# Altium PCB LED-18PCS.PcbDoc
Units mil, origin at the board's own origin, x right, y up, seen from the top; angles counter-clockwise.
Board outline 6000 x 4000 mil, 2 copper layers (Top Layer, Bottom Layer); 72 components, 5 nets, 198 pads, 18 vias.
Unrouted connection lines stored in the file: 85.
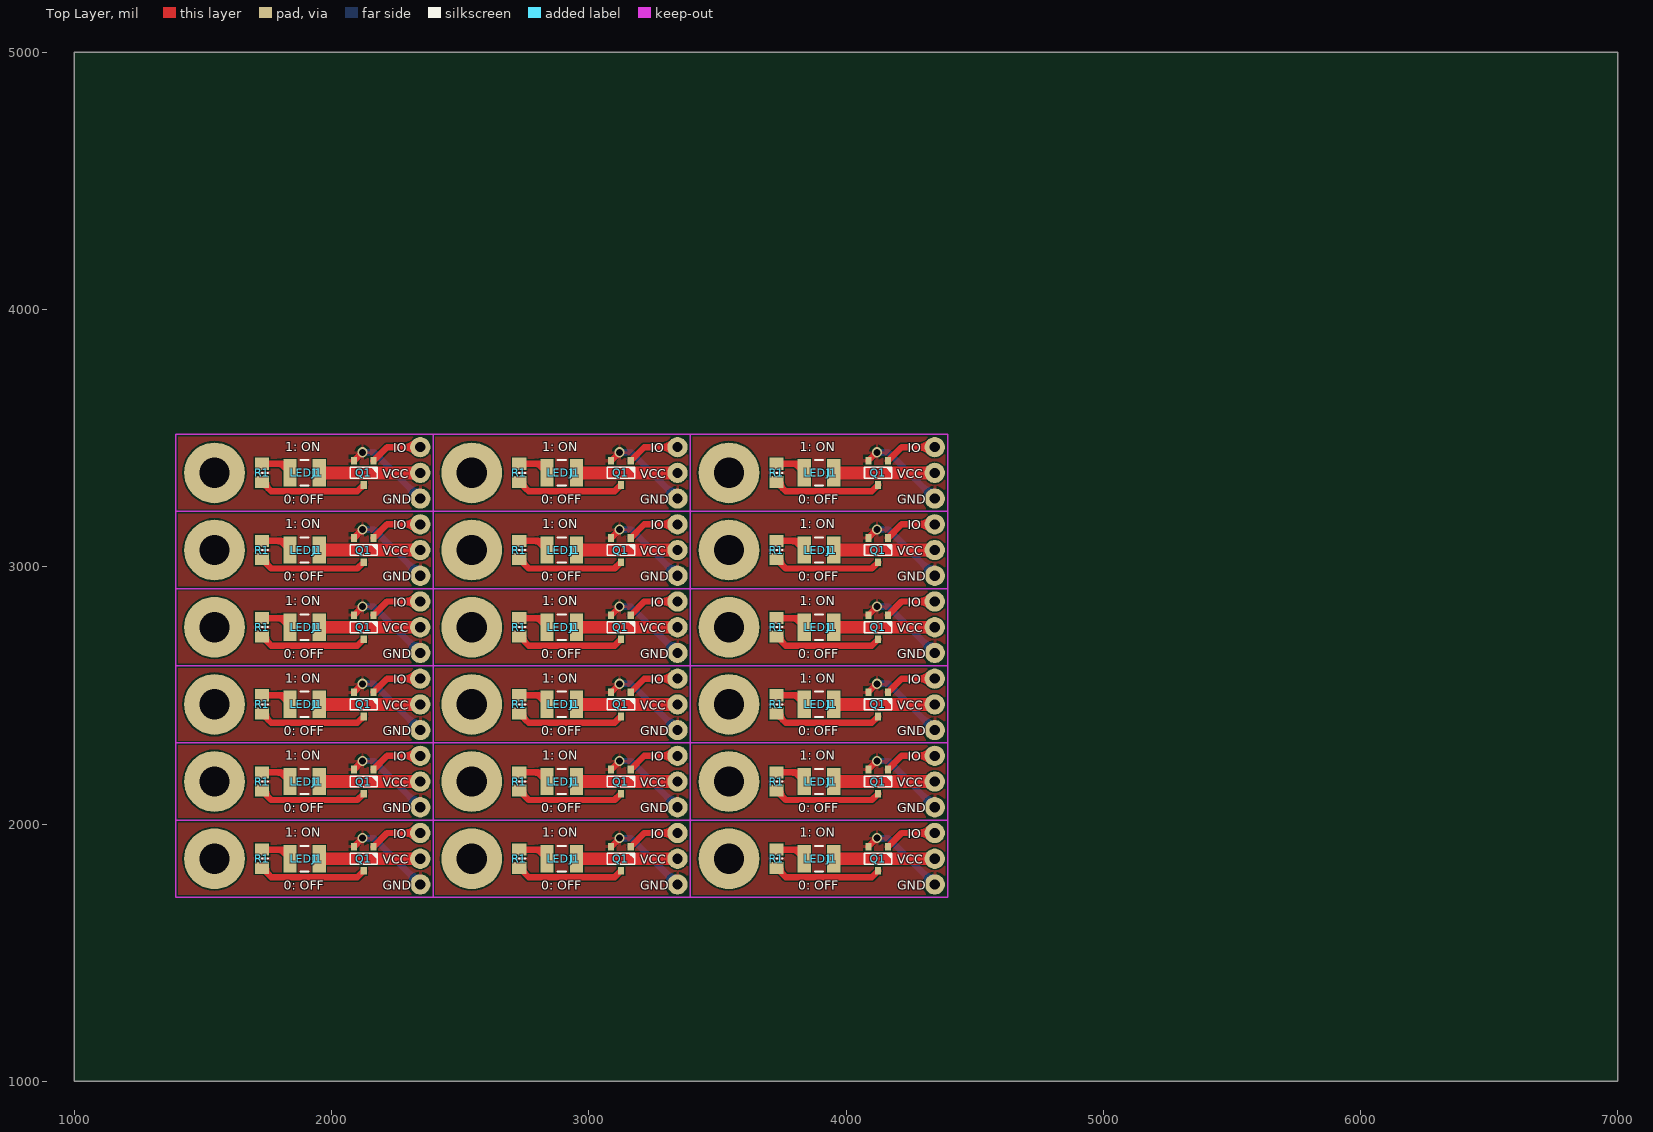
[diagram p0: Top Layer view]
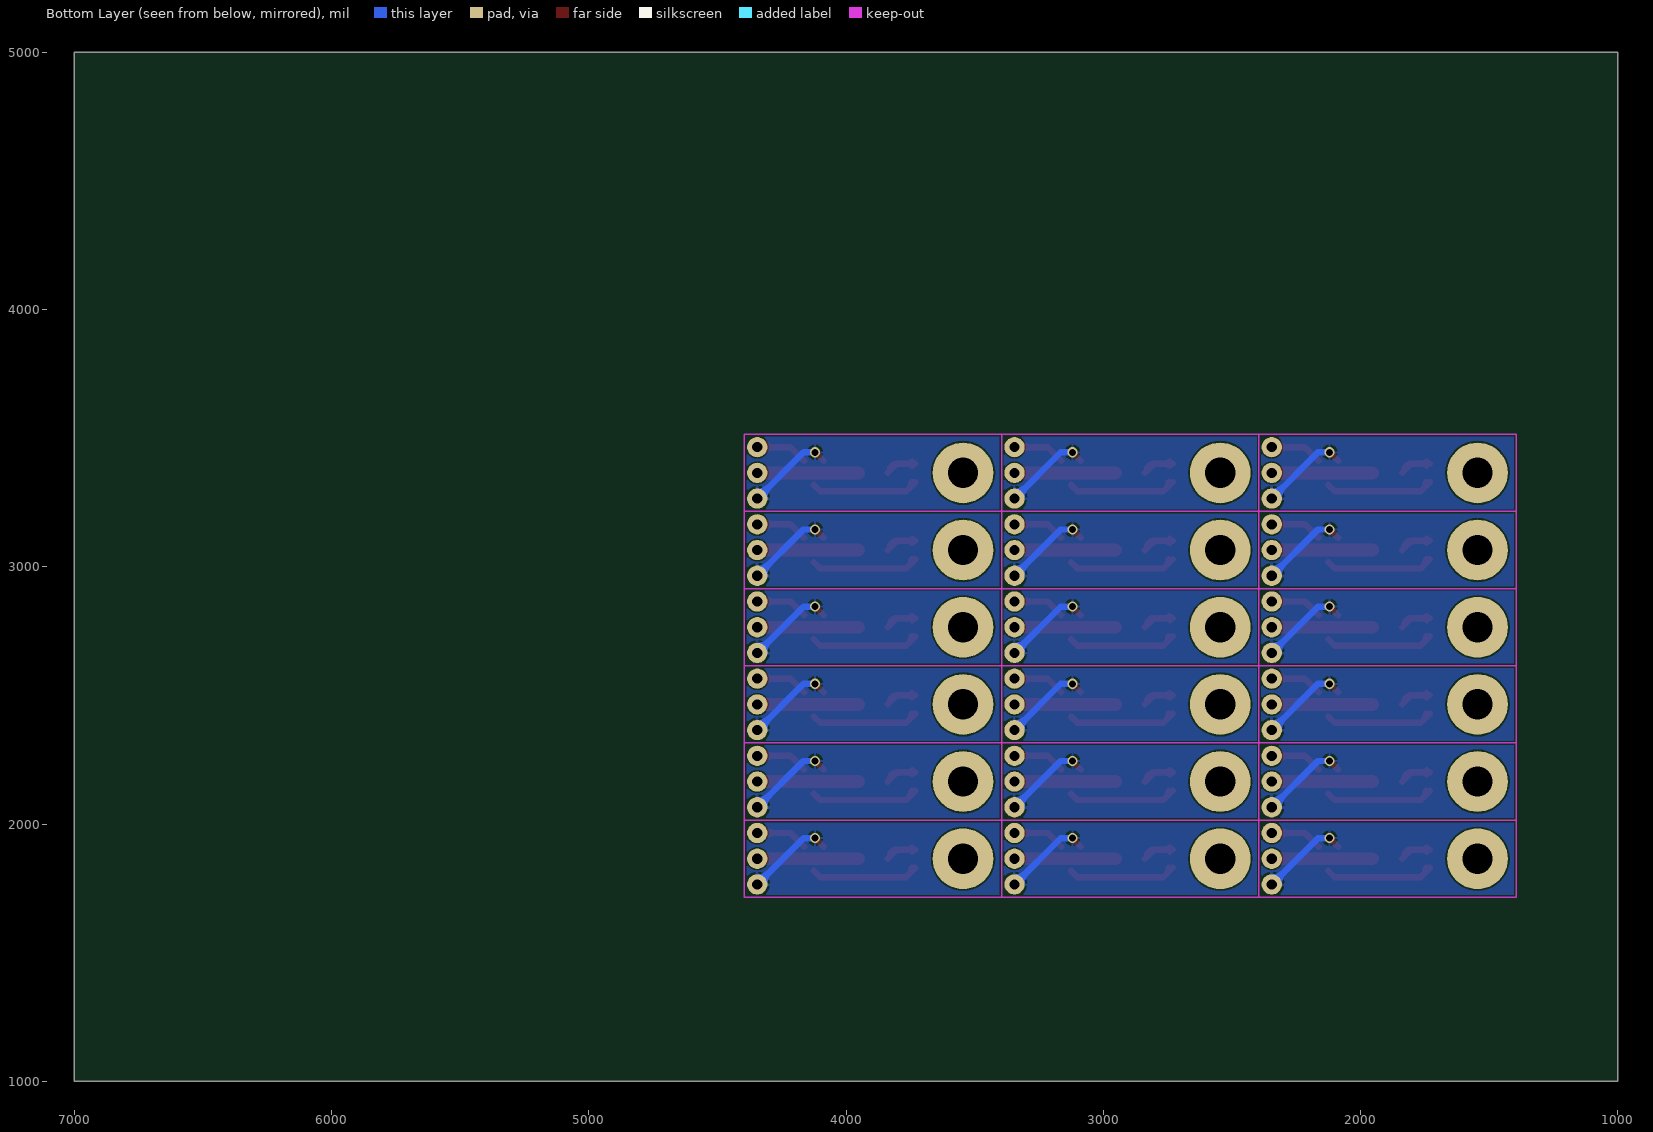
[diagram p1: Bottom Layer view, seen from below]

## Layer stack, top to bottom
Top Solder: solder mask 0.4, Solder Resist, Dk 3.5
Top Layer: signal copper 1.4
Dielectric 1: dielectric 12.6, FR-4, Dk 4.8
Bottom Layer: signal copper 1.4
Bottom Solder: solder mask 0.4, Solder Resist, Dk 3.5

## Board outline
1000,1000 7000,1000 7000,5000 1000,5000

## Design rules (kind name [scope] priority, off if disabled: settings)
Clearance [All] p1: gap=6
ComponentClearance [All] p1: gap=0 collisioncheckmode=3 verticalgap=0 showdistances=FALSE
PolygonConnect [All] p1: connectstyle=Relief reliefconductorwidth=10 reliefentries=4 polygonreliefangle="90 Angle" airgapwidth=10
RoutingVias [All] p1: holewidth=28 width=50 viastyle="Through Hole" minholewidth=28 minwidth=50 maxholewidth=28 maxwidth=50
SolderMaskExpansion [All] p1: expansion=4
Width [All] p1: maxlimit=100 minlimit=6 preferedwidth=10
28 further rules are at their usual default settings.

## Components (designator, comment, footprint, x,y, rotation, side; value= is the part's Value field where it differs from the comment)
J1 "CON3" DevModule 2895,3065 r0 top
J1 "CON3" DevModule 2895,3365 r0 top
J1 "CON3" DevModule 2895,2465 r0 top
J1 "CON3" DevModule 2895,2765 r0 top
J1 "CON3" DevModule 2895,1865 r0 top
J1 "CON3" DevModule 2895,2165 r0 top
J1 "CON3" DevModule 3895,2165 r0 top
J1 "CON3" DevModule 3895,1865 r0 top
J1 "CON3" DevModule 3895,2765 r0 top
J1 "CON3" DevModule 3895,2465 r0 top
J1 "CON3" DevModule 3895,3365 r0 top
J1 "CON3" DevModule 3895,3065 r0 top
J1 "CON3" DevModule 1895,2165 r0 top
J1 "CON3" DevModule 1895,1865 r0 top
J1 "CON3" DevModule 1895,2765 r0 top
J1 "CON3" DevModule 1895,2465 r0 top
J1 "CON3" DevModule 1895,3365 r0 top
J1 "CON3" DevModule 1895,3065 r0 top
LED1 "1210" C1210_N 2895,3065 r180 top
LED1 "1210" C1210_N 2895,3365 r180 top
LED1 "1210" C1210_N 2895,2465 r180 top
LED1 "1210" C1210_N 2895,2765 r180 top
LED1 "1210" C1210_N 2895,1865 r180 top
LED1 "1210" C1210_N 2895,2165 r180 top
LED1 "1210" C1210_N 3895,2165 r180 top
LED1 "1210" C1210_N 3895,1865 r180 top
LED1 "1210" C1210_N 3895,2765 r180 top
LED1 "1210" C1210_N 3895,2465 r180 top
LED1 "1210" C1210_N 3895,3365 r180 top
LED1 "1210" C1210_N 3895,3065 r180 top
LED1 "1210" C1210_N 1895,2165 r180 top
LED1 "1210" C1210_N 1895,1865 r180 top
LED1 "1210" C1210_N 1895,2765 r180 top
LED1 "1210" C1210_N 1895,2465 r180 top
LED1 "1210" C1210_N 1895,3365 r180 top
LED1 "1210" C1210_N 1895,3065 r180 top
Q1 "BJT_NPN" SOT23-3 3125,3065 r270 top
Q1 "BJT_NPN" SOT23-3 3125,3365 r270 top
Q1 "BJT_NPN" SOT23-3 3125,2465 r270 top
Q1 "BJT_NPN" SOT23-3 3125,2765 r270 top
Q1 "BJT_NPN" SOT23-3 3125,1865 r270 top
Q1 "BJT_NPN" SOT23-3 3125,2165 r270 top
Q1 "BJT_NPN" SOT23-3 4125,2165 r270 top
Q1 "BJT_NPN" SOT23-3 4125,1865 r270 top
Q1 "BJT_NPN" SOT23-3 4125,2765 r270 top
Q1 "BJT_NPN" SOT23-3 4125,2465 r270 top
Q1 "BJT_NPN" SOT23-3 4125,3365 r270 top
Q1 "BJT_NPN" SOT23-3 4125,3065 r270 top
Q1 "BJT_NPN" SOT23-3 2125,2165 r270 top
Q1 "BJT_NPN" SOT23-3 2125,1865 r270 top
Q1 "BJT_NPN" SOT23-3 2125,2765 r270 top
Q1 "BJT_NPN" SOT23-3 2125,2465 r270 top
Q1 "BJT_NPN" SOT23-3 2125,3365 r270 top
Q1 "BJT_NPN" SOT23-3 2125,3065 r270 top
R1 "4.7K" 6-0805_N 2730,3065 r90 top
R1 "4.7K" 6-0805_N 2730,3365 r90 top
R1 "4.7K" 6-0805_N 2730,2465 r90 top
R1 "4.7K" 6-0805_N 2730,2765 r90 top
R1 "4.7K" 6-0805_N 2730,1865 r90 top
R1 "4.7K" 6-0805_N 2730,2165 r90 top
R1 "4.7K" 6-0805_N 3730,2165 r90 top
R1 "4.7K" 6-0805_N 3730,1865 r90 top
R1 "4.7K" 6-0805_N 3730,2765 r90 top
R1 "4.7K" 6-0805_N 3730,2465 r90 top
R1 "4.7K" 6-0805_N 3730,3365 r90 top
R1 "4.7K" 6-0805_N 3730,3065 r90 top
R1 "4.7K" 6-0805_N 1730,2165 r90 top
R1 "4.7K" 6-0805_N 1730,1865 r90 top
R1 "4.7K" 6-0805_N 1730,2765 r90 top
R1 "4.7K" 6-0805_N 1730,2465 r90 top
R1 "4.7K" 6-0805_N 1730,3365 r90 top
R1 "4.7K" 6-0805_N 1730,3065 r90 top

## Footprints (in the part's own frame and the unit in brackets; to place one, negate y for a bottom-side part, rotate by r counter-clockwise, add the part's x,y. Pads: shape width x height; smd on the part's side, far side on the other; paste and mask are expansions set on the pad)
6-0805_N [mm] "Chip Resistor, Body 2.0x1.2mm, IPC Medium Density"
  rect 1.2x1.4 smd: 1(-0.9,0) 2(0.9,0)
  silkscreen extent 0,-0.6 0,0.6, body extent -1.07,-0.7 1.07,0.7, height 0.7
C1210_N [mm] "Chip Capacitor, Body 3.2x2.5mm, IPC Medium Density"
  rect 1.3x2.7 smd: 1(-1.45,0) 2(1.45,0)
  silkscreen extent -0.4,-1.25 0.4,1.25, body extent -1.7,-1.35 1.7,1.35, height 1.5
DevModule [mm]
  round 6 hole 3: 0(-8.89,0)
  round 2 hole 1: 1(11.43,2.54) 2(11.43,0) 3(11.43,-2.54)
  Keep-Out Layer lines w0.152: -12.7,-3.81 12.7,-3.81 12.7,3.81 -12.7,3.81 -12.7,-3.81
SOT23-3 [mil]
  rect 30x24 smd: 1(-47,38) 2(-47,-38) 3(47,0)
  silkscreen extent -21,-53 21,53, body extent -55,-57 55,57, height 51

## Part data
J1 J1 J1 J1 J1 J1 J1 J1 J1 J1 J1 J1 J1 J1 J1 J1 J1 J1: "Connector"
LED1 LED1 LED1 LED1 LED1 LED1 LED1 LED1 LED1 LED1 LED1 LED1 LED1 LED1 LED1 LED1 LED1 LED1: library part LED_3
Q1 Q1 Q1 Q1 Q1 Q1 Q1 Q1 Q1 Q1 Q1 Q1 Q1 Q1 Q1 Q1 Q1 Q1: "Transistor"
R1 R1 R1 R1 R1 R1 R1 R1 R1 R1 R1 R1 R1 R1 R1 R1 R1 R1: library part RES1_1

## Via types
v1: diameter 39.37, hole 27.56, Top Layer to Bottom Layer, tented both sides, 18 vias

## Nets (pads, with @x,y where several pads share a name; then routed paths per layer and width w, separated by ;. In a path a pad name is that pad's centre, name@x,y a point inside that pad or via, vN(x,y) a via of type N, cw(c..) or ccw(c..) an arc to the next point about the centre after c; other vN are vias at no path point)
GND: J1.3 Q1.2 | length 8066.3
  Top Layer w25: Q1.2@2087,1912 v1(2120,1945) ; Q1.2@2087,2212 v1(2120,2245) ; Q1.2@2087,2512 v1(2120,2545) ; Q1.2@2087,2812 v1(2120,2845) ; Q1.2@2087,3112 v1(2120,3145) ; Q1.2@2087,3412 v1(2120,3445) ; Q1.2@3087,1912 v1(3120,1945) ; Q1.2@3087,2212 v1(3120,2245) ; Q1.2@3087,2512 v1(3120,2545) ; Q1.2@3087,2812 v1(3120,2845) ; Q1.2@3087,3112 v1(3120,3145) ; Q1.2@3087,3412 v1(3120,3445) ; Q1.2@4087,1912 v1(4120,1945) ; Q1.2@4087,2212 v1(4120,2245) ; Q1.2@4087,2512 v1(4120,2545) ; Q1.2@4087,2812 v1(4120,2845) ; Q1.2@4087,3112 v1(4120,3145) ; Q1.2@4087,3412 v1(4120,3445)
  Bottom Layer w25: v1(2120,1945) 2165,1945 J1.3@2345,1765 ; v1(2120,2245) 2165,2245 J1.3@2345,2065 ; v1(2120,2545) 2165,2545 J1.3@2345,2365 ; v1(2120,2845) 2165,2845 J1.3@2345,2665 ; v1(2120,3145) 2165,3145 J1.3@2345,2965 ; v1(2120,3445) 2165,3445 J1.3@2345,3265 ; J1.3@2318.13,1765 ccw(c2253.26,1765) 2299.13,1810.87 ccw(c2345,1856.74) J1.3@2345,1791.87 ; J1.3@2318.13,2065 ccw(c2253.26,2065) 2299.13,2110.87 ccw(c2345,2156.74) J1.3@2345,2091.87 ; J1.3@2318.13,2365 ccw(c2253.26,2365) 2299.13,2410.87 ccw(c2345,2456.74) J1.3@2345,2391.87 ; J1.3@2318.13,2665 ccw(c2253.26,2665) 2299.13,2710.87 ccw(c2345,2756.74) J1.3@2345,2691.87 ; J1.3@2318.13,2965 ccw(c2253.26,2965) 2299.13,3010.87 ccw(c2345,3056.74) J1.3@2345,2991.87 ; J1.3@2318.13,3265 ccw(c2253.26,3265) 2299.13,3310.87 ccw(c2345,3356.74) J1.3@2345,3291.87 ; v1(3120,1945) 3165,1945 J1.3@3345,1765 ; v1(3120,2245) 3165,2245 J1.3@3345,2065 ; v1(3120,2545) 3165,2545 J1.3@3345,2365 ; v1(3120,2845) 3165,2845 J1.3@3345,2665 ; v1(3120,3145) 3165,3145 J1.3@3345,2965 ; v1(3120,3445) 3165,3445 J1.3@3345,3265 ; J1.3@3318.13,1765 ccw(c3253.26,1765) 3299.13,1810.87 ccw(c3345,1856.74) J1.3@3345,1791.87 ; J1.3@3318.13,2065 ccw(c3253.26,2065) 3299.13,2110.87 ccw(c3345,2156.74) J1.3@3345,2091.87 ; J1.3@3318.13,2365 ccw(c3253.26,2365) 3299.13,2410.87 ccw(c3345,2456.74) J1.3@3345,2391.87 ; J1.3@3318.13,2665 ccw(c3253.26,2665) 3299.13,2710.87 ccw(c3345,2756.74) J1.3@3345,2691.87 ; J1.3@3318.13,2965 ccw(c3253.26,2965) 3299.13,3010.87 ccw(c3345,3056.74) J1.3@3345,2991.87 ; J1.3@3318.13,3265 ccw(c3253.26,3265) 3299.13,3310.87 ccw(c3345,3356.74) J1.3@3345,3291.87 ; v1(4120,1945) 4165,1945 J1.3@4345,1765 ; v1(4120,2245) 4165,2245 J1.3@4345,2065 ; v1(4120,2545) 4165,2545 J1.3@4345,2365 ; v1(4120,2845) 4165,2845 J1.3@4345,2665 ; v1(4120,3145) 4165,3145 J1.3@4345,2965 ; v1(4120,3445) 4165,3445 J1.3@4345,3265 ; J1.3@4318.13,1765 ccw(c4253.26,1765) 4299.13,1810.87 ccw(c4345,1856.74) J1.3@4345,1791.87 ; J1.3@4318.13,2065 ccw(c4253.26,2065) 4299.13,2110.87 ccw(c4345,2156.74) J1.3@4345,2091.87 ; J1.3@4318.13,2365 ccw(c4253.26,2365) 4299.13,2410.87 ccw(c4345,2456.74) J1.3@4345,2391.87 ; J1.3@4318.13,2665 ccw(c4253.26,2665) 4299.13,2710.87 ccw(c4345,2756.74) J1.3@4345,2691.87 ; J1.3@4318.13,2965 ccw(c4253.26,2965) 4299.13,3010.87 ccw(c4345,3056.74) J1.3@4345,2991.87 ; J1.3@4318.13,3265 ccw(c4253.26,3265) 4299.13,3310.87 ccw(c4345,3356.74) J1.3@4345,3291.87
NetJ1_1: J1.1 Q1.1 | length 5505.3
  Top Layer w25: Q1.1@2163,1912 2216,1965 J1.1@2345,1965 ; Q1.1@2163,2212 2216,2265 J1.1@2345,2265 ; Q1.1@2163,2512 2216,2565 J1.1@2345,2565 ; Q1.1@2163,2812 2216,2865 J1.1@2345,2865 ; Q1.1@2163,3112 2216,3165 J1.1@2345,3165 ; Q1.1@2163,3412 2216,3465 J1.1@2345,3465 ; J1.1@2326,1946 ccw(c2280.13,1900.13) 2280.13,1965 ccw(c2280.13,2029.87) J1.1@2326,1984 ; J1.1@2326,2246 ccw(c2280.13,2200.13) 2280.13,2265 ccw(c2280.13,2329.87) J1.1@2326,2284 ; J1.1@2326,2546 ccw(c2280.13,2500.13) 2280.13,2565 ccw(c2280.13,2629.87) J1.1@2326,2584 ; J1.1@2326,2846 ccw(c2280.13,2800.13) 2280.13,2865 ccw(c2280.13,2929.87) J1.1@2326,2884 ; J1.1@2326,3146 ccw(c2280.13,3100.13) 2280.13,3165 ccw(c2280.13,3229.87) J1.1@2326,3184 ; J1.1@2326,3446 ccw(c2280.13,3400.13) 2280.13,3465 ccw(c2280.13,3529.87) J1.1@2326,3484 ; Q1.1@3163,1912 3216,1965 J1.1@3345,1965 ; Q1.1@3163,2212 3216,2265 J1.1@3345,2265 ; Q1.1@3163,2512 3216,2565 J1.1@3345,2565 ; Q1.1@3163,2812 3216,2865 J1.1@3345,2865 ; Q1.1@3163,3112 3216,3165 J1.1@3345,3165 ; Q1.1@3163,3412 3216,3465 J1.1@3345,3465 ; J1.1@3326,1946 ccw(c3280.13,1900.13) 3280.13,1965 ccw(c3280.13,2029.87) J1.1@3326,1984 ; J1.1@3326,2246 ccw(c3280.13,2200.13) 3280.13,2265 ccw(c3280.13,2329.87) J1.1@3326,2284 ; J1.1@3326,2546 ccw(c3280.13,2500.13) 3280.13,2565 ccw(c3280.13,2629.87) J1.1@3326,2584 ; J1.1@3326,2846 ccw(c3280.13,2800.13) 3280.13,2865 ccw(c3280.13,2929.87) J1.1@3326,2884 ; J1.1@3326,3146 ccw(c3280.13,3100.13) 3280.13,3165 ccw(c3280.13,3229.87) J1.1@3326,3184 ; J1.1@3326,3446 ccw(c3280.13,3400.13) 3280.13,3465 ccw(c3280.13,3529.87) J1.1@3326,3484 ; Q1.1@4163,1912 4216,1965 J1.1@4345,1965 ; Q1.1@4163,2212 4216,2265 J1.1@4345,2265 ; Q1.1@4163,2512 4216,2565 J1.1@4345,2565 ; Q1.1@4163,2812 4216,2865 J1.1@4345,2865 ; Q1.1@4163,3112 4216,3165 J1.1@4345,3165 ; Q1.1@4163,3412 4216,3465 J1.1@4345,3465 ; J1.1@4326,1946 ccw(c4280.13,1900.13) 4280.13,1965 ccw(c4280.13,2029.87) J1.1@4326,1984 ; J1.1@4326,2246 ccw(c4280.13,2200.13) 4280.13,2265 ccw(c4280.13,2329.87) J1.1@4326,2284 ; J1.1@4326,2546 ccw(c4280.13,2500.13) 4280.13,2565 ccw(c4280.13,2629.87) J1.1@4326,2584 ; J1.1@4326,2846 ccw(c4280.13,2800.13) 4280.13,2865 ccw(c4280.13,2929.87) J1.1@4326,2884 ; J1.1@4326,3146 ccw(c4280.13,3100.13) 4280.13,3165 ccw(c4280.13,3229.87) J1.1@4326,3184 ; J1.1@4326,3446 ccw(c4280.13,3400.13) 4280.13,3465 ccw(c4280.13,3529.87) J1.1@4326,3484
NetLED1_2: LED1.2 R1.2 | length 4318.4
  Top Layer w25: R1.2@1730,1900.43 1802.48,1900.43 ; R1.2@1730,2200.43 1802.48,2200.43 ; R1.2@1730,2500.43 1802.48,2500.43 ; R1.2@1730,2800.43 1802.48,2800.43 ; R1.2@1730,3100.43 1802.48,3100.43 ; R1.2@1730,3400.43 1802.48,3400.43 ; R1.2@1741.8,1892.57 cw(c1760.79,1873.58) 1760.79,1900.43 cw(c1760.79,1927.28) R1.2@1741.8,1908.3 ; R1.2@1741.8,2192.57 cw(c1760.79,2173.58) 1760.79,2200.43 cw(c1760.79,2227.28) R1.2@1741.8,2208.3 ; R1.2@1741.8,2492.57 cw(c1760.79,2473.58) 1760.79,2500.43 cw(c1760.79,2527.28) R1.2@1741.8,2508.3 ; R1.2@1741.8,2792.57 cw(c1760.79,2773.58) 1760.79,2800.43 cw(c1760.79,2827.28) R1.2@1741.8,2808.3 ; R1.2@1741.8,3092.57 cw(c1760.79,3073.58) 1760.79,3100.43 cw(c1760.79,3127.28) R1.2@1741.8,3108.3 ; R1.2@1741.8,3392.57 cw(c1760.79,3373.58) 1760.79,3400.43 cw(c1760.79,3427.28) R1.2@1741.8,3408.3 ; 1787.3,1900.43 cw(c1787.3,1841.95) LED1.2@1828.66,1883.3 ; 1787.3,2200.43 cw(c1787.3,2141.95) LED1.2@1828.66,2183.3 ; 1787.3,2500.43 cw(c1787.3,2441.95) LED1.2@1828.66,2483.3 ; 1787.3,2800.43 cw(c1787.3,2741.95) LED1.2@1828.66,2783.3 ; 1787.3,3100.43 cw(c1787.3,3041.95) LED1.2@1828.66,3083.3 ; 1787.3,3400.43 cw(c1787.3,3341.95) LED1.2@1828.66,3383.3 ; LED1.2@1826.44,1886.26 ccw(c1802.48,1873.1) 1802.48,1900.43 ; LED1.2@1826.44,2186.26 ccw(c1802.48,2173.1) 1802.48,2200.43 ; LED1.2@1826.44,2486.26 ccw(c1802.48,2473.1) 1802.48,2500.43 ; LED1.2@1826.44,2786.26 ccw(c1802.48,2773.1) 1802.48,2800.43 ; LED1.2@1826.44,3086.26 ccw(c1802.48,3073.1) 1802.48,3100.43 ; LED1.2@1826.44,3386.26 ccw(c1802.48,3373.1) 1802.48,3400.43 ; LED1.2@1837.91,1865 1802.48,1900.43 ; LED1.2@1837.91,2165 1802.48,2200.43 ; LED1.2@1837.91,2465 1802.48,2500.43 ; LED1.2@1837.91,2765 1802.48,2800.43 ; LED1.2@1837.91,3065 1802.48,3100.43 ; LED1.2@1837.91,3365 1802.48,3400.43 ; R1.2@2730,1900.43 2802.48,1900.43 ; R1.2@2730,2200.43 2802.48,2200.43 ; R1.2@2730,2500.43 2802.48,2500.43 ; R1.2@2730,2800.43 2802.48,2800.43 ; R1.2@2730,3100.43 2802.48,3100.43 ; R1.2@2730,3400.43 2802.48,3400.43 ; R1.2@2741.8,1892.57 cw(c2760.79,1873.58) 2760.79,1900.43 cw(c2760.79,1927.28) R1.2@2741.8,1908.3 ; R1.2@2741.8,2192.57 cw(c2760.79,2173.58) 2760.79,2200.43 cw(c2760.79,2227.28) R1.2@2741.8,2208.3 ; R1.2@2741.8,2492.57 cw(c2760.79,2473.58) 2760.79,2500.43 cw(c2760.79,2527.28) R1.2@2741.8,2508.3 ; R1.2@2741.8,2792.57 cw(c2760.79,2773.58) 2760.79,2800.43 cw(c2760.79,2827.28) R1.2@2741.8,2808.3 ; R1.2@2741.8,3092.57 cw(c2760.79,3073.58) 2760.79,3100.43 cw(c2760.79,3127.28) R1.2@2741.8,3108.3 ; R1.2@2741.8,3392.57 cw(c2760.79,3373.58) 2760.79,3400.43 cw(c2760.79,3427.28) R1.2@2741.8,3408.3 ; 2787.3,1900.43 cw(c2787.3,1841.95) LED1.2@2828.66,1883.3 ; 2787.3,2200.43 cw(c2787.3,2141.95) LED1.2@2828.66,2183.3 ; 2787.3,2500.43 cw(c2787.3,2441.95) LED1.2@2828.66,2483.3 ; 2787.3,2800.43 cw(c2787.3,2741.95) LED1.2@2828.66,2783.3 ; 2787.3,3100.43 cw(c2787.3,3041.95) LED1.2@2828.66,3083.3 ; 2787.3,3400.43 cw(c2787.3,3341.95) LED1.2@2828.66,3383.3 ; LED1.2@2826.44,1886.26 ccw(c2802.48,1873.1) 2802.48,1900.43 ; LED1.2@2826.44,2186.26 ccw(c2802.48,2173.1) 2802.48,2200.43 ; LED1.2@2826.44,2486.26 ccw(c2802.48,2473.1) 2802.48,2500.43 ; LED1.2@2826.44,2786.26 ccw(c2802.48,2773.1) 2802.48,2800.43 ; LED1.2@2826.44,3086.26 ccw(c2802.48,3073.1) 2802.48,3100.43 ; LED1.2@2826.44,3386.26 ccw(c2802.48,3373.1) 2802.48,3400.43 ; LED1.2@2837.91,1865 2802.48,1900.43 ; LED1.2@2837.91,2165 2802.48,2200.43 ; LED1.2@2837.91,2465 2802.48,2500.43 ; LED1.2@2837.91,2765 2802.48,2800.43 ; LED1.2@2837.91,3065 2802.48,3100.43 ; LED1.2@2837.91,3365 2802.48,3400.43 ; R1.2@3730,1900.43 3802.48,1900.43 ; R1.2@3730,2200.43 3802.48,2200.43 ; R1.2@3730,2500.43 3802.48,2500.43 ; R1.2@3730,2800.43 3802.48,2800.43 ; R1.2@3730,3100.43 3802.48,3100.43 ; R1.2@3730,3400.43 3802.48,3400.43 ; R1.2@3741.8,1892.57 cw(c3760.79,1873.58) 3760.79,1900.43 cw(c3760.79,1927.28) R1.2@3741.8,1908.3 ; R1.2@3741.8,2192.57 cw(c3760.79,2173.58) 3760.79,2200.43 cw(c3760.79,2227.28) R1.2@3741.8,2208.3 ; R1.2@3741.8,2492.57 cw(c3760.79,2473.58) 3760.79,2500.43 cw(c3760.79,2527.28) R1.2@3741.8,2508.3 ; R1.2@3741.8,2792.57 cw(c3760.79,2773.58) 3760.79,2800.43 cw(c3760.79,2827.28) R1.2@3741.8,2808.3 ; R1.2@3741.8,3092.57 cw(c3760.79,3073.58) 3760.79,3100.43 cw(c3760.79,3127.28) R1.2@3741.8,3108.3 ; R1.2@3741.8,3392.57 cw(c3760.79,3373.58) 3760.79,3400.43 cw(c3760.79,3427.28) R1.2@3741.8,3408.3 ; 3787.3,1900.43 cw(c3787.3,1841.95) LED1.2@3828.66,1883.3 ; 3787.3,2200.43 cw(c3787.3,2141.95) LED1.2@3828.66,2183.3 ; 3787.3,2500.43 cw(c3787.3,2441.95) LED1.2@3828.66,2483.3 ; 3787.3,2800.43 cw(c3787.3,2741.95) LED1.2@3828.66,2783.3 ; 3787.3,3100.43 cw(c3787.3,3041.95) LED1.2@3828.66,3083.3 ; 3787.3,3400.43 cw(c3787.3,3341.95) LED1.2@3828.66,3383.3 ; LED1.2@3826.44,1886.26 ccw(c3802.48,1873.1) 3802.48,1900.43 ; LED1.2@3826.44,2186.26 ccw(c3802.48,2173.1) 3802.48,2200.43 ; LED1.2@3826.44,2486.26 ccw(c3802.48,2473.1) 3802.48,2500.43 ; LED1.2@3826.44,2786.26 ccw(c3802.48,2773.1) 3802.48,2800.43 ; LED1.2@3826.44,3086.26 ccw(c3802.48,3073.1) 3802.48,3100.43 ; LED1.2@3826.44,3386.26 ccw(c3802.48,3373.1) 3802.48,3400.43 ; LED1.2@3837.91,1865 3802.48,1900.43 ; LED1.2@3837.91,2165 3802.48,2200.43 ; LED1.2@3837.91,2465 3802.48,2500.43 ; LED1.2@3837.91,2765 3802.48,2800.43 ; LED1.2@3837.91,3065 3802.48,3100.43 ; LED1.2@3837.91,3365 3802.48,3400.43
NetQ1_3: Q1.3 R1.1 | length 8077.8
  Top Layer w25: R1.1@1730,1829.57 1766.22,1793.35 2100.35,1793.35 Q1.3@2125,1818 ; R1.1@1730,2129.57 1766.22,2093.35 2100.35,2093.35 Q1.3@2125,2118 ; R1.1@1730,2429.57 1766.22,2393.35 2100.35,2393.35 Q1.3@2125,2418 ; R1.1@1730,2729.57 1766.22,2693.35 2100.35,2693.35 Q1.3@2125,2718 ; R1.1@1730,3029.57 1766.22,2993.35 2100.35,2993.35 Q1.3@2125,3018 ; R1.1@1730,3329.57 1766.22,3293.35 2100.35,3293.35 Q1.3@2125,3318 ; R1.1@1745.06,1829.57 ccw(c1781.41,1829.57) 1755.71,1803.86 ; R1.1@1745.06,2129.57 ccw(c1781.41,2129.57) 1755.71,2103.86 ; R1.1@1745.06,2429.57 ccw(c1781.41,2429.57) 1755.71,2403.86 ; R1.1@1745.06,2729.57 ccw(c1781.41,2729.57) 1755.71,2703.86 ; R1.1@1745.06,3029.57 ccw(c1781.41,3029.57) 1755.71,3003.86 ; R1.1@1745.06,3329.57 ccw(c1781.41,3329.57) 1755.71,3303.86 ; R1.1@2730,1829.57 2766.22,1793.35 3100.35,1793.35 Q1.3@3125,1818 ; R1.1@2730,2129.57 2766.22,2093.35 3100.35,2093.35 Q1.3@3125,2118 ; R1.1@2730,2429.57 2766.22,2393.35 3100.35,2393.35 Q1.3@3125,2418 ; R1.1@2730,2729.57 2766.22,2693.35 3100.35,2693.35 Q1.3@3125,2718 ; R1.1@2730,3029.57 2766.22,2993.35 3100.35,2993.35 Q1.3@3125,3018 ; R1.1@2730,3329.57 2766.22,3293.35 3100.35,3293.35 Q1.3@3125,3318 ; R1.1@2745.06,1829.57 ccw(c2781.41,1829.57) 2755.71,1803.86 ; R1.1@2745.06,2129.57 ccw(c2781.41,2129.57) 2755.71,2103.86 ; R1.1@2745.06,2429.57 ccw(c2781.41,2429.57) 2755.71,2403.86 ; R1.1@2745.06,2729.57 ccw(c2781.41,2729.57) 2755.71,2703.86 ; R1.1@2745.06,3029.57 ccw(c2781.41,3029.57) 2755.71,3003.86 ; R1.1@2745.06,3329.57 ccw(c2781.41,3329.57) 2755.71,3303.86 ; R1.1@3730,1829.57 3766.22,1793.35 4100.35,1793.35 Q1.3@4125,1818 ; R1.1@3730,2129.57 3766.22,2093.35 4100.35,2093.35 Q1.3@4125,2118 ; R1.1@3730,2429.57 3766.22,2393.35 4100.35,2393.35 Q1.3@4125,2418 ; R1.1@3730,2729.57 3766.22,2693.35 4100.35,2693.35 Q1.3@4125,2718 ; R1.1@3730,3029.57 3766.22,2993.35 4100.35,2993.35 Q1.3@4125,3018 ; R1.1@3730,3329.57 3766.22,3293.35 4100.35,3293.35 Q1.3@4125,3318 ; R1.1@3745.06,1829.57 ccw(c3781.41,1829.57) 3755.71,1803.86 ; R1.1@3745.06,2129.57 ccw(c3781.41,2129.57) 3755.71,2103.86 ; R1.1@3745.06,2429.57 ccw(c3781.41,2429.57) 3755.71,2403.86 ; R1.1@3745.06,2729.57 ccw(c3781.41,2729.57) 3755.71,2703.86 ; R1.1@3745.06,3029.57 ccw(c3781.41,3029.57) 3755.71,3003.86 ; R1.1@3745.06,3329.57 ccw(c3781.41,3329.57) 3755.71,3303.86
VCC: J1.2 LED1.1 | length 7072.4
  Top Layer w50: LED1.1@1952.09,1865 J1.2@2345,1865 ; LED1.1@1952.09,2165 J1.2@2345,2165 ; LED1.1@1952.09,2465 J1.2@2345,2465 ; LED1.1@1952.09,2765 J1.2@2345,2765 ; LED1.1@1952.09,3065 J1.2@2345,3065 ; LED1.1@1952.09,3365 J1.2@2345,3365 ; LED1.1@2952.09,1865 J1.2@3345,1865 ; LED1.1@2952.09,2165 J1.2@3345,2165 ; LED1.1@2952.09,2465 J1.2@3345,2465 ; LED1.1@2952.09,2765 J1.2@3345,2765 ; LED1.1@2952.09,3065 J1.2@3345,3065 ; LED1.1@2952.09,3365 J1.2@3345,3365 ; LED1.1@3952.09,1865 J1.2@4345,1865 ; LED1.1@3952.09,2165 J1.2@4345,2165 ; LED1.1@3952.09,2465 J1.2@4345,2465 ; LED1.1@3952.09,2765 J1.2@4345,2765 ; LED1.1@3952.09,3065 J1.2@4345,3065 ; LED1.1@3952.09,3365 J1.2@4345,3365
pads on no net: J1.0

## Polygon pours and split planes (outlines as drawn)
GND on Top Layer "Keep-Out Layer-No Net" (solid, pour order 56): 3395,2915 2395,2915 2395,3215 3395,3215
GND on Top Layer "Keep-Out Layer-No Net" (solid, pour order 58): 3395,3215 2395,3215 2395,3515 3395,3515
GND on Top Layer "Keep-Out Layer-No Net" (solid, pour order 60): 3395,2315 2395,2315 2395,2615 3395,2615
GND on Top Layer "Keep-Out Layer-No Net" (solid, pour order 62): 3395,2615 2395,2615 2395,2915 3395,2915
GND on Top Layer "Keep-Out Layer-No Net" (solid, pour order 64): 3395,1715 2395,1715 2395,2015 3395,2015
GND on Top Layer "Keep-Out Layer-No Net" (solid, pour order 66): 3395,2015 2395,2015 2395,2315 3395,2315
GND on Top Layer "Keep-Out Layer-No Net" (solid, pour order 67): 4395,2015 3395,2015 3395,2315 4395,2315
GND on Top Layer "Keep-Out Layer-No Net" (solid, pour order 68): 4395,1715 3395,1715 3395,2015 4395,2015
GND on Top Layer "Keep-Out Layer-No Net" (solid, pour order 69): 4395,2615 3395,2615 3395,2915 4395,2915
GND on Top Layer "Keep-Out Layer-No Net" (solid, pour order 70): 4395,2315 3395,2315 3395,2615 4395,2615
GND on Top Layer "Keep-Out Layer-No Net" (solid, pour order 71): 4395,3215 3395,3215 3395,3515 4395,3515
GND on Top Layer "Keep-Out Layer-No Net" (solid, pour order 72): 4395,2915 3395,2915 3395,3215 4395,3215
GND on Top Layer "Keep-Out Layer-No Net" (solid, pour order 65): 2395,2015 1395,2015 1395,2315 2395,2315
GND on Top Layer "Keep-Out Layer-No Net" (solid, pour order 63): 2395,1715 1395,1715 1395,2015 2395,2015
GND on Top Layer "Keep-Out Layer-No Net" (solid, pour order 61): 2395,2615 1395,2615 1395,2915 2395,2915
GND on Top Layer "Keep-Out Layer-No Net" (solid, pour order 59): 2395,2315 1395,2315 1395,2615 2395,2615
GND on Top Layer "Keep-Out Layer-No Net" (solid, pour order 57): 2395,3215 1395,3215 1395,3515 2395,3515
GND on Top Layer "Keep-Out Layer-No Net" (solid, pour order 55): 2395,2915 1395,2915 1395,3215 2395,3215
GND on Bottom Layer "Keep-Out Layer-No Net" (solid, remove dead copper, pour order 38): 3395,2915 2395,2915 2395,3215 3395,3215
GND on Bottom Layer "Keep-Out Layer-No Net" (solid, remove dead copper, pour order 40): 3395,3215 2395,3215 2395,3515 3395,3515
GND on Bottom Layer "Keep-Out Layer-No Net" (solid, remove dead copper, pour order 42): 3395,2315 2395,2315 2395,2615 3395,2615
GND on Bottom Layer "Keep-Out Layer-No Net" (solid, remove dead copper, pour order 44): 3395,2615 2395,2615 2395,2915 3395,2915
GND on Bottom Layer "Keep-Out Layer-No Net" (solid, remove dead copper, pour order 46): 3395,1715 2395,1715 2395,2015 3395,2015
GND on Bottom Layer "Keep-Out Layer-No Net" (solid, remove dead copper, pour order 48): 3395,2015 2395,2015 2395,2315 3395,2315
GND on Bottom Layer "Keep-Out Layer-No Net" (solid, remove dead copper, pour order 49): 4395,2015 3395,2015 3395,2315 4395,2315
GND on Bottom Layer "Keep-Out Layer-No Net" (solid, remove dead copper, pour order 50): 4395,1715 3395,1715 3395,2015 4395,2015
GND on Bottom Layer "Keep-Out Layer-No Net" (solid, remove dead copper, pour order 51): 4395,2615 3395,2615 3395,2915 4395,2915
GND on Bottom Layer "Keep-Out Layer-No Net" (solid, remove dead copper, pour order 52): 4395,2315 3395,2315 3395,2615 4395,2615
GND on Bottom Layer "Keep-Out Layer-No Net" (solid, remove dead copper, pour order 53): 4395,3215 3395,3215 3395,3515 4395,3515
GND on Bottom Layer "Keep-Out Layer-No Net" (solid, remove dead copper, pour order 54): 4395,2915 3395,2915 3395,3215 4395,3215
GND on Bottom Layer "Keep-Out Layer-No Net" (solid, remove dead copper, pour order 47): 2395,2015 1395,2015 1395,2315 2395,2315
GND on Bottom Layer "Keep-Out Layer-No Net" (solid, remove dead copper, pour order 45): 2395,1715 1395,1715 1395,2015 2395,2015
GND on Bottom Layer "Keep-Out Layer-No Net" (solid, remove dead copper, pour order 43): 2395,2615 1395,2615 1395,2915 2395,2915
GND on Bottom Layer "Keep-Out Layer-No Net" (solid, remove dead copper, pour order 41): 2395,2315 1395,2315 1395,2615 2395,2615
GND on Bottom Layer "Keep-Out Layer-No Net" (solid, remove dead copper, pour order 39): 2395,3215 1395,3215 1395,3515 2395,3515
GND on Bottom Layer "Keep-Out Layer-No Net" (solid, remove dead copper, pour order 37): 2395,2915 1395,2915 1395,3215 2395,3215

## Silkscreen, mask and mechanical layers (free items; w line width, h text height)
Top Overlay:
  text "1: ON" at 1820,3450 h35.43
  text "1: ON" at 2820,3450 h35.43
  text "1: ON" at 3820,3450 h35.43
  text "IO" at 2240,3445 h35.43
  text "IO" at 3240,3445 h35.43
  text "IO" at 4240,3445 h35.43
  text "VCC" at 2200,3345 h35.43
  text "VCC" at 3200,3345 h35.43
  text "VCC" at 4200,3345 h35.43
  text "0: OFF" at 1815,3245 h35.43
  text "GND" at 2200,3245 h35.43
  text "0: OFF" at 2815,3245 h35.43
  text "GND" at 3200,3245 h35.43
  text "0: OFF" at 3815,3245 h35.43
  text "GND" at 4200,3245 h35.43
  text "1: ON" at 1820,3150 h35.43
  text "1: ON" at 2820,3150 h35.43
  text "1: ON" at 3820,3150 h35.43
  text "IO" at 2240,3145 h35.43
  text "IO" at 3240,3145 h35.43
  text "IO" at 4240,3145 h35.43
  text "VCC" at 2200,3045 h35.43
  text "VCC" at 3200,3045 h35.43
  text "VCC" at 4200,3045 h35.43
  text "0: OFF" at 1815,2945 h35.43
  text "GND" at 2200,2945 h35.43
  text "0: OFF" at 2815,2945 h35.43
  text "GND" at 3200,2945 h35.43
  text "0: OFF" at 3815,2945 h35.43
  text "GND" at 4200,2945 h35.43
  text "1: ON" at 1820,2850 h35.43
  text "1: ON" at 2820,2850 h35.43
  text "1: ON" at 3820,2850 h35.43
  text "IO" at 2240,2845 h35.43
  text "IO" at 3240,2845 h35.43
  text "IO" at 4240,2845 h35.43
  text "VCC" at 2200,2745 h35.43
  text "VCC" at 3200,2745 h35.43
  text "VCC" at 4200,2745 h35.43
  text "0: OFF" at 1815,2645 h35.43
  text "GND" at 2200,2645 h35.43
  text "0: OFF" at 2815,2645 h35.43
  text "GND" at 3200,2645 h35.43
  text "0: OFF" at 3815,2645 h35.43
  text "GND" at 4200,2645 h35.43
  text "1: ON" at 1820,2550 h35.43
  text "1: ON" at 2820,2550 h35.43
  text "1: ON" at 3820,2550 h35.43
  text "IO" at 2240,2545 h35.43
  text "IO" at 3240,2545 h35.43
  text "IO" at 4240,2545 h35.43
  text "VCC" at 2200,2445 h35.43
  text "VCC" at 3200,2445 h35.43
  text "VCC" at 4200,2445 h35.43
  text "0: OFF" at 1815,2345 h35.43
  text "GND" at 2200,2345 h35.43
  text "0: OFF" at 2815,2345 h35.43
  text "GND" at 3200,2345 h35.43
  text "0: OFF" at 3815,2345 h35.43
  text "GND" at 4200,2345 h35.43
  text "1: ON" at 1820,2250 h35.43
  text "1: ON" at 2820,2250 h35.43
  text "1: ON" at 3820,2250 h35.43
  text "IO" at 2240,2245 h35.43
  text "IO" at 3240,2245 h35.43
  text "IO" at 4240,2245 h35.43
  text "VCC" at 2200,2145 h35.43
  text "VCC" at 3200,2145 h35.43
  text "VCC" at 4200,2145 h35.43
  text "0: OFF" at 1815,2045 h35.43
  text "GND" at 2200,2045 h35.43
  text "0: OFF" at 2815,2045 h35.43
  text "GND" at 3200,2045 h35.43
  text "0: OFF" at 3815,2045 h35.43
  text "GND" at 4200,2045 h35.43
  text "1: ON" at 1820,1950 h35.43
  text "1: ON" at 2820,1950 h35.43
  text "1: ON" at 3820,1950 h35.43
  text "IO" at 2240,1945 h35.43
  text "IO" at 3240,1945 h35.43
  text "IO" at 4240,1945 h35.43
  text "VCC" at 2200,1845 h35.43
  text "VCC" at 3200,1845 h35.43
  text "VCC" at 4200,1845 h35.43
  text "0: OFF" at 1815,1745 h35.43
  text "GND" at 2200,1745 h35.43
  text "0: OFF" at 2815,1745 h35.43
  text "GND" at 3200,1745 h35.43
  text "0: OFF" at 3815,1745 h35.43
  text "GND" at 4200,1745 h35.43